# EAGLE board Clock_circuit_fix (EAGLE 7.2.0)
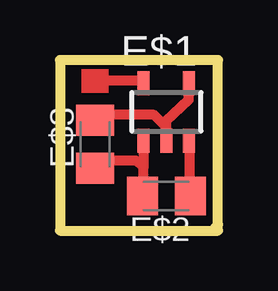
[diagram p0: board, top side]

Size 6.6 x 7.11 mm. Coordinates in mm from the lower left corner, seen from the top.
Outline: 6.6,0.25 6.6,7.11 0,7.11 0,0 6.6,0 6.6,0.25
Outline: 6.6,0.25 6.48,0.13
Copper layers (1*16): Top 0.035mm / dielectric 1.5mm / Bottom 0.035mm
Design rules "default": minimum track width 10mil, minimum drill 24mil, track to track 8mil, track to pad 8mil, pad to pad 8mil, via to via 8mil, smd to smd 8mil, copper to edge 40mil, drill to drill 8mil, minimum pad ring 10mil, minimum via ring 8mil, stop-mask expansion 4mil, vias tented up to drill 0mil, thermal gap 10mil

## Footprints (pad centres in the part's own frame; a part is rotated, then mirrored left to right if it is on the bottom)
SOT23-5 = smd 0.5 x 1: 1 -0.95,-1.2; 2 0,-1.2; 3 0.95,-1.2; 4 0.95,1.2; 5 -0.95,1.2
C0805K = smd 1.3 x 1.6: 1 -1,0; 2 1,0

## Placement (x,y rotation side)
E$1  [SOT23-5]  4.45,4.95 0 top
E$2  [C0805K]  4.45,1.45 180 top
E$3  [C0805K]  1.47,3.6 90 top

## Library data of the parts
E$1 = zetex
E$2 E$3 = rcl

## Tracks (layer width: path | path; a pad name or v marks a point on that pad's centre or on a via)
S$1
  Top 0.406: 4.45,4.32 4.45,4.57 5.38,5.45 5.39,5.97 | 4.45,3.81 4.45,4.32 | 4.45,4.32 3.94,4.83 1.52,4.83 1.4,4.7
S$2
  Top 0.406: 5.4,3.69 5.4,1.66
S$3
  Top 0.406: 3.49,3.56 3.49,2.67 | 3.49,1.5 3.49,2.67 | 3.49,2.67 3.17,2.92 1.4,2.92
S$4
  Top 0.406: 3.52,6.25 1.7,6.25
(copper drawn outside any net)
  shapes: Top area x2